# Altium PCB DRS_SCH-2017-05-16.PcbDoc
Units mil, origin at the board's own origin, x right, y up, seen from the top; angles counter-clockwise.
Board outline 5511.81 x 3149.61 mil, 2 copper layers (Top Layer, Bottom Layer); 76 components, 173 nets, 431 pads, 81 vias.
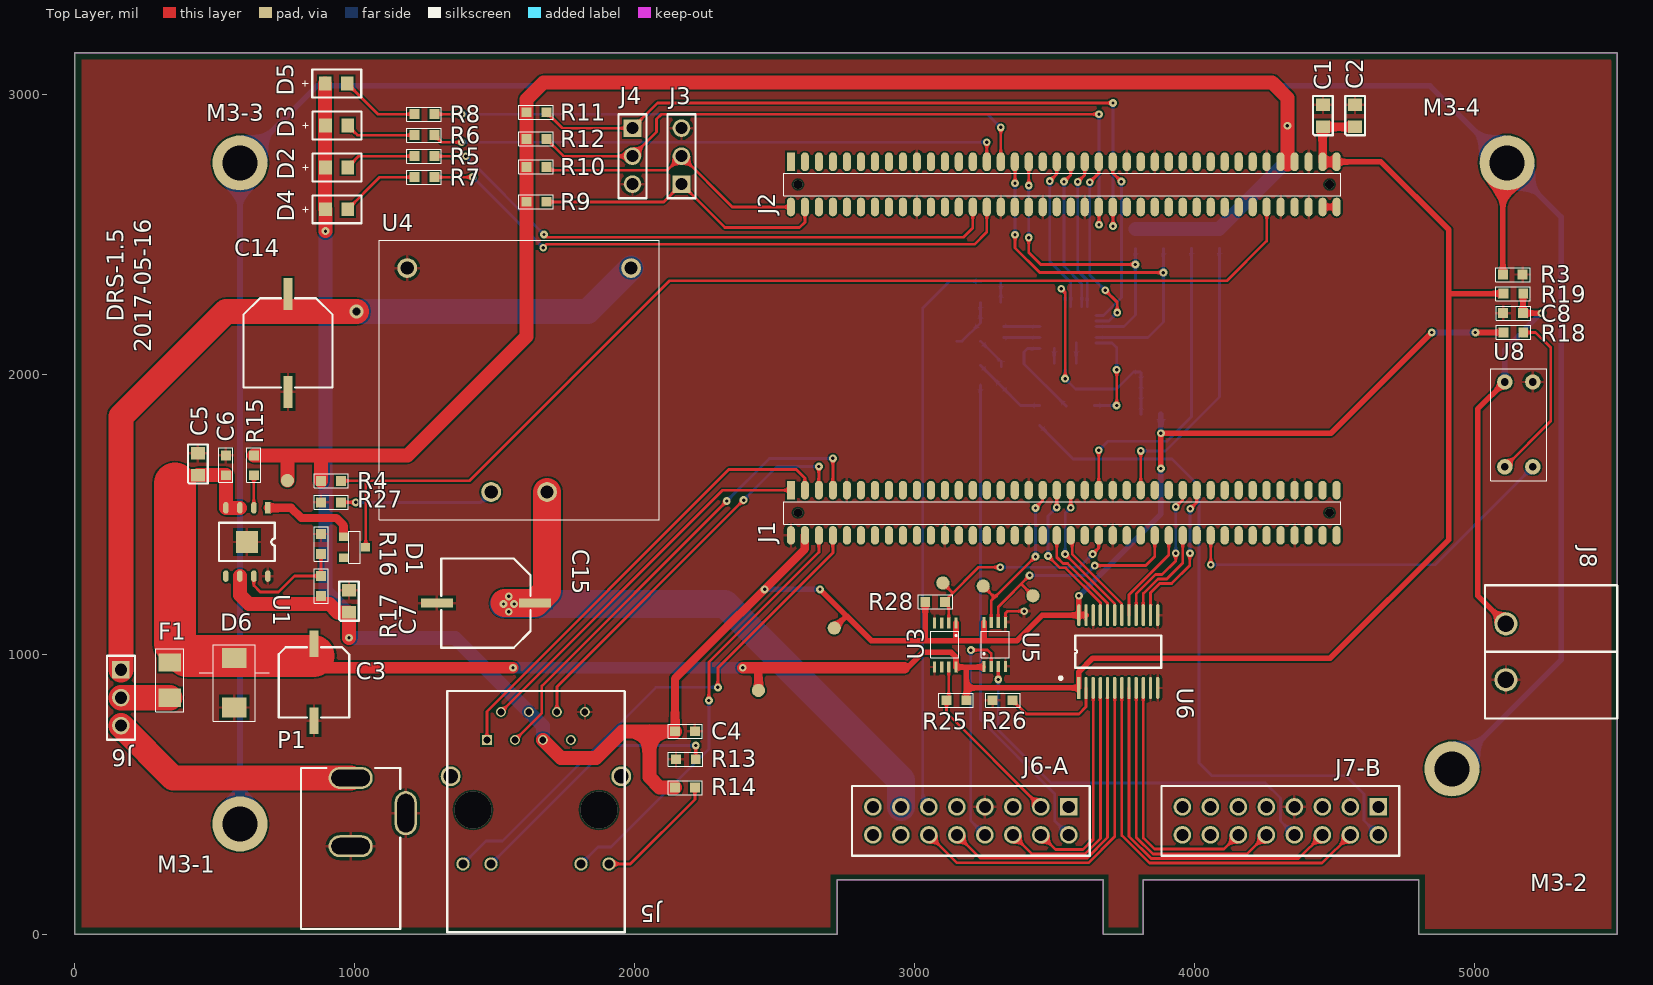
[diagram p0: Top Layer view]
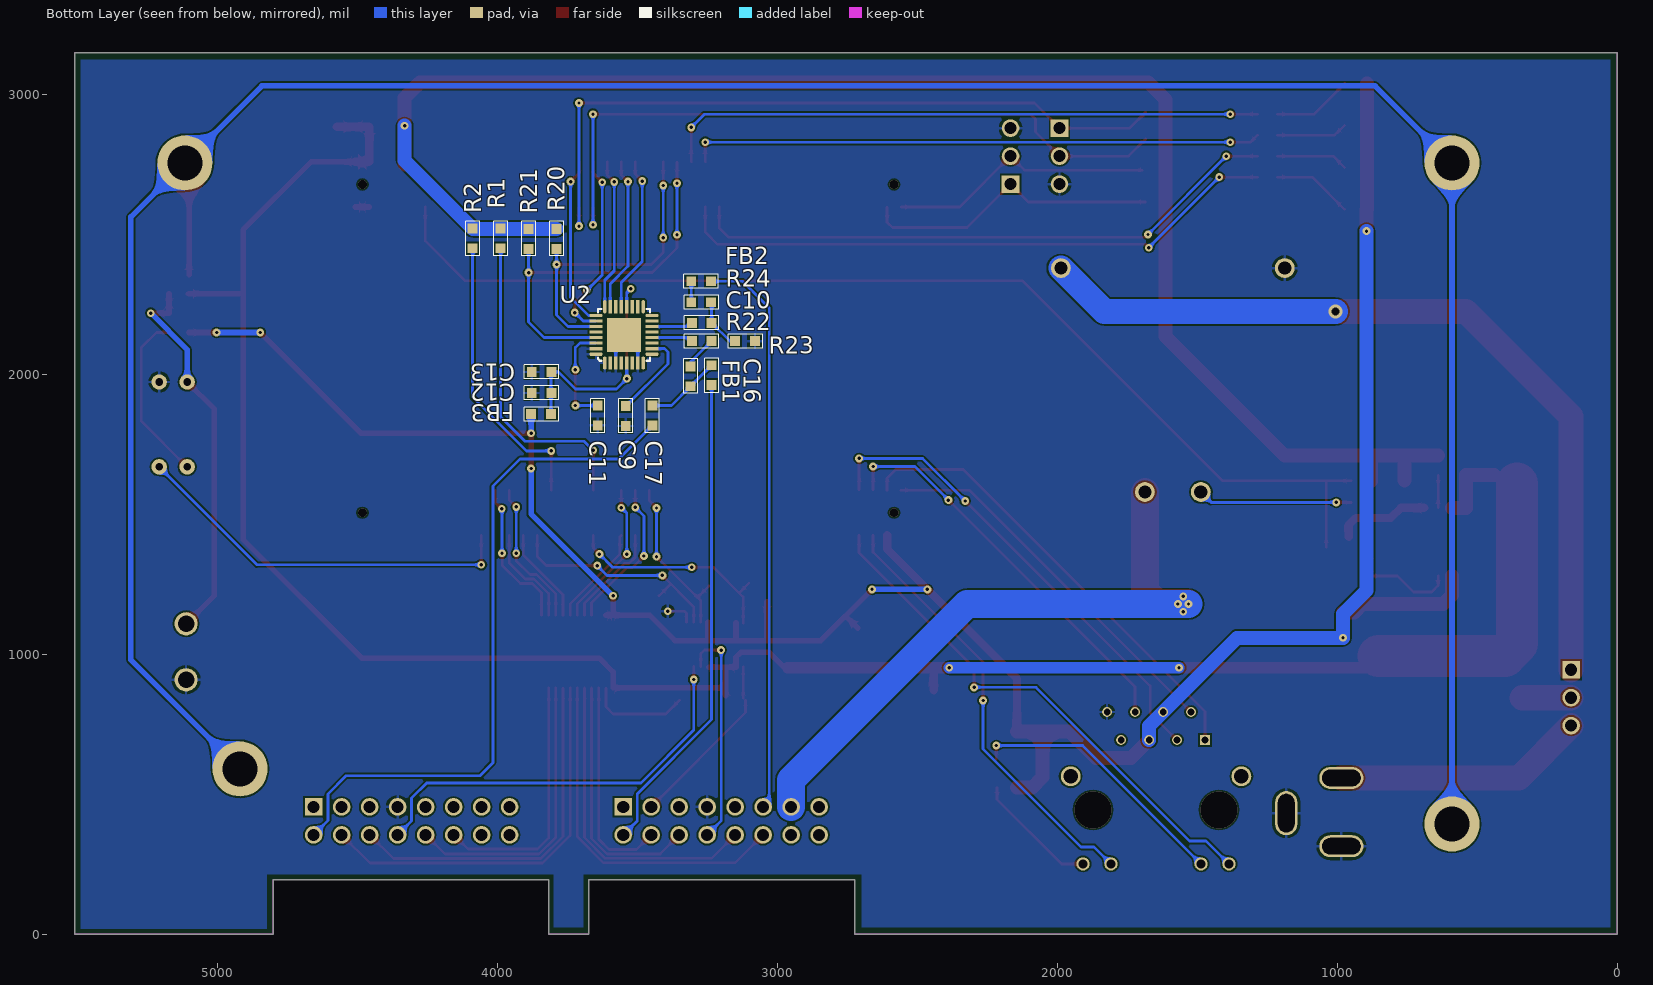
[diagram p1: Bottom Layer view, seen from below]

## Layer stack, top to bottom
Top Layer: signal copper 1.4
Dielectric: dielectric 12.6, FR-4, Dk 4.8
Bottom Layer: signal copper 1.4

## Board outline
0,0 0,3149.61 5511.81,3149.61 5511.81,0 4803.15,0 4803.15,194.33 3818.9,194.33 3818.9,0 3674.69,0 3674.69,194.33 2724.02,194.33 2724.02,0

## Design rules (kind name [scope] priority, off if disabled: settings)
Clearance [All] p1: gap=6
HoleSize [All] p1: absolutevalues=TRUE maxlimit=150 minlimit=1 maxpercent=80.000 minpercent=20.000
HoleToHoleClearance [All] p1: gap=8 allowstackedmicrovias=TRUE
MinimumSolderMaskSliver [All] p1: minsoldermaskwidth=0
PolygonConnect [All] p1: connectstyle=Relief reliefconductorwidth=10 reliefentries=4 polygonreliefangle="90 Angle"
RoutingVias [All] p1: holewidth=28 width=50 viastyle="Through Hole" minholewidth=12 minwidth=20 maxholewidth=208 maxwidth=250
SilkToSilkClearance [All] p1: silktosilkclearance=0
SilkscreenOverComponentPads SilkToSolderMaskClearance [IsPad] p1: minsilkscreentomaskgap=0
SolderMaskExpansion [All] p1: expansion=6
Width [All] p1: maxlimit=1000 minlimit=6 preferedwidth=10
23 further rules are at their usual default settings.

## Classes and differential pairs
component class "BTB CONNECTOR": C1 C2 J1 J2 R1 R2
component class DRS_SCH-02-24: C3 C4 C5 C6 C7 C8 C9 C10 C11 C12 C13 C14 C15 C16 C17 D1 D2 D3 D4 D5 D6 F1 FB1 FB2 FB3 J3 J4 J5 J6 J6-A J7-B J8 M3-1 M3-2 M3-3 M3-4 P1 R3 R4 R5 R6 R7 R8 R9 R10 R11 R12 R13 R14 R15 R16 R17 R18 R19 R20 R21 R22 R23 R24 R25 R26 R27 R28 U1 U2 U3 U4 U5 U6 U8

## Components (designator, comment, footprint, x,y, rotation, side; value= is the part's Value field where it differs from the comment)
C1 "10uF" C0805 4460,2885 r90 top
C2 "10uF" C0805 4575,2885 r90 top
C3 "47UF" RVT6.3 855,900 r90 top
C4 "0.01uF" 0603 2145,725 r0 top
C5 "10uF" C0805 440,1640 r90 top
C6 "1uF" 0603 540,1640 r90 top
C7 "10uF" C0805 980,1150 r90 top
C8 "22nF" 0603 5104,2219 r0 top
C9 "0.1uF" 0603 3543,1816.13 r90 bottom
C10 "1uF" 0603 3236,2184 r0 bottom
C11 "0.1uF" 0603 3643,1889 r270 bottom
C12 "0.1uF" 0603 3808,1934 r0 bottom
C13 "0.1uF" 0603 3808,2009 r0 bottom
C14 "470UF" RVT8 762,2113 r90 top
C15 "470UF" RVT8 1469,1183 r0 top
C16 "1uF" 0603 3236,2033 r270 bottom
C17 "1uF" 0603 3448,1889 r270 bottom
D1 "BAT54A-7-F" S9013 960,1420 r270 top
D2 "LED_BLUE" LED_BLUE 975,2740 r180 top
D3 "LED_BLUE" LED_BLUE 975,2890 r180 top
D4 "LED_BLUE" LED_BLUE 975,2590 r180 top
D5 "LED_BLUE" LED_BLUE 973.74,3040 r180 top
D6 "P4SMAJ5A" P4SMAJ5A 570,810 r90 top
F1 "FUSE 1A" "FUSE 1A" 340,845 r90 top
FB1 "BLM18HE102SN1D" 0603 3311,1958 r90 bottom
FB2 "BLM18HE102SN1D" 0603 3238,2333 r0 bottom
FB3 "BLM18HE102SN1D" 0603 3881,1858 r180 bottom
J1 "SMT-80-1-27P" DB40X2-1.27 2559.06,1425.2 r90 top
J2 "SMT-80-1-27P" DB40X2-1.27 2559.06,2598.43 r90 top
J3 "SIP4" SIP3 2168,2680 r90 top
J4 "SIP4" SIP3 1993,2880 r270 top
J5 "HR911105A" HR911105A 1822.99,794.02 r180 top
J6 "SIP4" SIP3 165,945 r270 top
J6-A "DB16-2.54" DB2X8-2.54 3551.97,455 r270 top
J7-B "DB16-2.54" DB2X8-2.54 4657.99,455 r270 top
J8 "EDG-2P" LZ1R-5.08-02P-140 5114,1109 r270 top
M3-1 "M3" M3#1 590.55,393.7 r0 top
M3-2 "M3" M3#2 4921.26,393.7 r0 top
M3-3 "M3" M3#1 590.55,2755.91 r0 top
M3-4 "M3" M3#3 4921.26,2755.91 r0 top
P1 "PJ200-A" KLD-0202 985.98,19.02 r90 top
R1 "4.7K" 0603 3990,2521.87 r270 bottom
R2 "4.7K" 0603 4090,2521.87 r270 bottom
R3 "0R" 0603 5103,2357 r0 top
R4 "10K" 0603 880,1620 r0 top
R5 "820R" 0603 1285,2780 r180 top
R6 "820R" 0603 1285,2855 r180 top
R7 "820R" 0603 1285,2705 r180 top
R8 "820R" 0603 1285,2930 r180 top
R9 "100K" 0603 1685,2617 r180 top
R10 "100K" 0603 1685,2742 r180 top
R11 "100K" 0603 1685,2937 r180 top
R12 "100K" 0603 1685,2842 r180 top
R13 "470R" 0603 2219,625 r180 top
R14 "470R" 0603 2145,524 r0 top
R15 "10K" 0603 640,1640 r90 top
R16 "15K" 0603 880,1430 r270 top
R17 "47K" 0603 880,1280 r270 top
R18 "220R" 0603 5105,2150 r0 top
R19 "220R" 0603 5176,2289 r180 top
R20 "1.5K" 0603 3790,2449 r90 bottom
R21 "1.5K" 0603 3890,2449 r90 bottom
R22 "2.7K" 0603 3236,2119 r0 bottom
R23 "4.7K" 0603 3152,2119 r180 bottom
R24 "10K" 0603 3308.87,2258 r180 bottom
R25 "10K" 0603 3186,836 r180 top
R26 "0R" 0603 3280,836 r0 top
R27 "0R" 0603 880,1543 r0 top
R28 "DNP" 0603 3039,1187 r0 top
U1 "RT9018AXXGSP" RT9018 690,1520 r270 top
U2 "SGTL5000 32QFN" "SGTL5000 32QFN" 3618,2055 r90 bottom
U3 "74LVC2T45" 74LVC2T45 3149,1112 r270 top
U4 "URB2405YMD-6WR2" URB2405YMD-6WR2 1488,1580 r0 top
U5 "74LVC2T45" 74LVC2T45 3249,957 r90 top
U6 "74LVC8T45 SOT355-1" 74LVC8T245 3588,880 r90 top
U8 "TPL521-1" TPL521-1 5110,1670 r90 top

## Footprints (in the part's own frame and the unit in brackets; to place one, negate y for a bottom-side part, rotate by r counter-clockwise, add the part's x,y. Pads: shape width x height; smd on the part's side, far side on the other; paste and mask are expansions set on the pad)
74LVC2T45 [mm]
  rect 1x0.3 smd: 1(0,0) 2(0,-0.65) 3(0,-1.3) 4(0,-1.95) 5(4,-1.95) 6(4,-1.3) 7(4,-0.65) 8(4,0)
  silkscreen extent 0.76,-2.29 3.18,0.25
74LVC8T245 [mm]
  rect 2x0.3 smd: 1(0,0)
  oval 2x0.3 smd: 2(0,-0.65) 3(0,-1.3) 4(0,-1.95) 5(0,-2.6) 6(0,-3.25) 7(0,-3.9) 8(0,-4.55) 9(0,-5.2) 10(0,-5.85) 11(0,-6.5) 12(0,-7.15) 13(6.6,-7.15) 14(6.6,-6.5) 15(6.6,-5.85) 16(6.6,-5.2) 17(6.6,-4.55) 18(6.6,-3.9) 19(6.6,-3.25) 20(6.6,-2.6) 21(6.6,-1.95) 22(6.6,-1.3) 23(6.6,-0.65) 24(6.6,0)
  silkscreen extent 0.76,-7.48 4.76,1.78
0603 [mm]
  rect 0.9x0.9 smd: 1(0,0) 2(1.8,0)
  silkscreen extent -0.64,-0.64 2.49,0.64
C0805 [mm]
  rect 1.15x1.25 smd: 1(0,0) 2(2,0)
  silkscreen extent -0.76,-0.89 2.79,0.89
DB2X8-2.54 [mm]
  rect 1.6x1.6 hole 1.1: 1(0,0)
  round 1.6 hole 1.1: 2(2.54,0) 3(0,-2.54) 4(2.54,-2.54) 5(0,-5.08) 6(2.54,-5.08) 7(0,-7.62) 8(2.54,-7.62) 9(0,-10.16) 10(2.54,-10.16) 11(0,-12.7) 12(2.54,-12.7) 13(0,-15.24) 14(2.54,-15.24) 15(0,-17.78) 16(2.54,-17.78)
  silkscreen extent -1.91,-19.69 4.45,1.9
DB40X2-1.27 [mm]
  rect 1.7x0.74 smd: 1(4.1,0)
  oval 1.7x0.74 smd: 2(0,0) 3(4.1,-1.27) 4(0,-1.27) 5(4.1,-2.54) 6(0,-2.54) 7(4.1,-3.81) 8(0,-3.81) 9(4.1,-5.08) 10(0,-5.08) 11(4.1,-6.35) 12(0,-6.35) 13(4.1,-7.62) 14(0,-7.62) 15(4.1,-8.89) 16(0,-8.89) 17(4.1,-10.16) 18(0,-10.16) 19(4.1,-11.43) 20(0,-11.43) 21(4.1,-12.7) 22(0,-12.7) 23(4.1,-13.97) 24(0,-13.97) 25(4.1,-15.24) 26(0,-15.24) 27(4.1,-16.51) 28(0,-16.51) 29(4.1,-17.78) 30(0,-17.78) 31(4.1,-19.05) 32(0,-19.05) 33(4.1,-20.32) 34(0,-20.32) 35(4.1,-21.59) 36(0,-21.59) 37(4.1,-22.86) 38(0,-22.86) 39(4.1,-24.13) 40(0,-24.13) 41(4.1,-25.4) 42(0,-25.4) 43(4.1,-26.67) 44(0,-26.67) 45(4.1,-27.94) 46(0,-27.94) 47(4.1,-29.21) 48(0,-29.21) 49(4.1,-30.48) 50(0,-30.48) 51(4.1,-31.75) 52(0,-31.75) 53(4.1,-33.02) 54(0,-33.02) 55(4.1,-34.29) 56(0,-34.29) 57(4.1,-35.56) 58(0,-35.56) 59(4.1,-36.83) 60(0,-36.83) 61(4.1,-38.1) 62(0,-38.1) 63(4.1,-39.37) 64(0,-39.37) 65(4.1,-40.64) 66(0,-40.64) 67(4.1,-41.91) 68(0,-41.91) 69(4.1,-43.18) 70(0,-43.18) 71(4.1,-44.45) 72(0,-44.45) 73(4.1,-45.72) 74(0,-45.72) 75(4.1,-46.99) 76(0,-46.99) 77(4.1,-48.26) 78(0,-48.26) 79(4.1,-49.53) 80(0,-49.53)
  silkscreen extent 1.02,-49.91 3.05,0.63
"FUSE 1A" [mm]
  rect 1.65x2.03 smd: 1(0,0) 2(3.2,0)
  silkscreen extent -1.27,-1.27 4.44,1.27
HR911105A [mm]
  rect 0.89x0.89 hole 0.6: 1(8.89,2.54)
  round 0.89 hole 0.6: 2(7.62,0) 3(6.35,2.54) 4(5.08,0) 5(3.81,2.54) 6(2.54,0) 7(1.27,2.54) 8(0,0)
  round 1.2 hole 0.8: 9(11.065,13.79) 10(8.525,13.79) 11(0.355,13.79) 12(-2.185,13.79)
  round 1.8 hole 1.3: 14(-3.305,5.84) 15(12.185,5.84)
  silkscreen extent -3.61,-1.91 12.49,20
KLD-0202 [mm] "DC Power Jack, 2.5mm, KLD Series, PCB Mount"
  oval 2x4 hole 1.5 slot 3.5 at 90 deg: 1A(13.7,0) 2A(7.5,0)
  oval 4x2 hole 1.5 slot 3.5 at 0 deg: 3A(10.5,-5)
  silkscreen extent 0,-4.5 14.6,4.5
LED_BLUE [mm]
  rect 1.15x1.25 smd: 1(0,0) 2(2,0)
  silkscreen extent -1.27,-1.27 4.06,1.27
LZ1R-5.08-02P-140 [mm]
  round 2.1 hole 1.5: 1(0,0) 2(5.08,0)
  silkscreen extent -3.5,-1.9 8.58,10.1
M3#1 [mm]
  round 5 hole 3.2: 1(0,0)
M3#2 [mm]
  round 5 hole 3.2: 1(0,5)
M3#3 [mm]
  round 5 hole 3.2: 1(5,0)
P4SMAJ5A [mm]
  rect 1.8x2.2 smd: 1(0,0) 2(4.5,0)
  silkscreen extent -1.27,-3.17 5.71,3.18
RT9018 [mm]
  rect 1.05x0.49 smd: 1(-0.09,0)
  oval 1.05x0.49 smd: 2(-0.09,-1.27) 3(-0.09,-2.54) 4(-0.09,-3.81) 5(6.11,-3.81) 6(6.11,-2.54) 7(6.11,-1.27) 8(6.11,0)
  rect 2x2 smd: 9(3.01,-1.905)
  silkscreen extent 1.27,-4.44 4.75,0.64
RVT6.3 [mm]
  rect 2.4x0.8 smd: 1(-3.5,0) 2(3.5,0)
  silkscreen extent -3.2,-3.2 3.17,3.2
RVT8 [mm]
  rect 2.9x0.8 smd: 1(-4.45,0) 2(4.45,0)
  silkscreen extent -4.05,-4.05 4.05,4.05
S9013 [mm]
  rect 0.8x0.8 smd: 1(0,0) 2(1.9,0) 3(0.95,2.02)
  silkscreen extent -0.51,0.51 2.41,1.52
"SGTL5000 32QFN" [mm]
  oct 1.2x0.3 smd: 1(-0.35,0) 8(-0.35,-3.5) 17(4.75,-3.5) 24(4.75,0)
  rect 1.2x0.3 smd: 2(-0.35,-0.5) 3(-0.35,-1) 4(-0.35,-1.5) 5(-0.35,-2) 6(-0.35,-2.5) 7(-0.35,-3) 18(4.75,-3) 19(4.75,-2.5) 20(4.75,-2) 21(4.75,-1.5) 22(4.75,-1) 23(4.75,-0.5)
  oct 0.3x1.2 smd: 9(0.45,-4.3) 16(3.95,-4.3) 25(3.95,0.8) 32(0.45,0.8)
  rect 0.3x1.2 smd: 10(0.95,-4.3) 11(1.45,-4.3) 12(1.95,-4.3) 13(2.45,-4.3) 14(2.95,-4.3) 15(3.45,-4.3) 26(3.45,0.8) 27(2.95,0.8) 28(2.45,0.8) 29(1.95,0.8) 30(1.45,0.8) 31(0.95,0.8)
  rect 3.1x3.1 smd: 33(2.2,-1.75)
  silkscreen extent -0.15,-4.1 4.55,0.6
SIP3 [mm]
  rect 1.6x1.6 hole 1.1: 1(0,0)
  round 1.6 hole 1.1: 2(2.54,0) 3(5.08,0)
  silkscreen extent -1.27,-1.27 6.35,1.27
TPL521-1 [mm]
  round 1.4 hole 0.7: 1(0,0) 2(0,-2.54) 3(7.7,-2.54) 4(7.7,0)
  silkscreen extent -1.27,-3.81 8.89,1.27
URB2405YMD-6WR2 [mm]
  round 1.8 hole 1.2: 1(0,0) 2(5.08,0) 3(12.7,20.32) 4(-7.62,20.32)
  silkscreen extent -10.16,-2.54 15.24,22.86

## Part data
C1 C2 C4 C5 C6 C7 C8 C9 C10 C11 C12 C13 C16 C17: library part CAP, "Capacitor"
C3 C14 C15: library part 7343
P1: library part PWR2.5, "Low Voltage Power Supply Connector"
R1 R2 R3 R4 R5 R6 R7 R8 R9 R10 R11 R12 R13 R14 R15 R16 R17 R18 R19 R20 R21 R22 R23 R24 R25 R26 R27 R28: library part RES2

## Free pads (board coordinates)
  round 47.24 smd: 0(3246,1244) 1(3424,1209) 2(3102,1255) 3(2443,871) 4(760,1621) 5(2714,1094)

## Via types
v1: diameter 28, hole 12, Top Layer to Bottom Layer, 74 vias
v2: diameter 31.5, hole 31.5, Top Layer to Bottom Layer, 4 vias
v3: diameter 131.89, hole 131.89, Top Layer to Bottom Layer, 2 vias
v4: diameter 50, hole 28, Top Layer to Bottom Layer, 1 vias

## Nets (pads, with @x,y where several pads share a name; then routed paths per layer and width w, separated by ;. In a path a pad name is that pad's centre, name@x,y a point inside that pad or via, vN(x,y) a via of type N, cw(c..) or ccw(c..) an arc to the next point about the centre after c; other vN are vias at no path point)
A_CD: J1.46 pad.2 R28.2 U3.2 | length 796
  Top Layer w10: pad.2 3137,1220 ; U3.2 3123.41,1205.41 3229,1311 v1(3307,1311) ; v1(3637,1358) 3659.06,1380.06 J1.46
  Bottom Layer w10: v1(3307,1311) 3590,1311 v1(3637,1358)
A_IO1: J1.39 U6.21 | length 548.4
  Top Layer w10: v1(3478,1351.37) 3520.37,1309 3540,1309 3664.77,1184.23 U6.21 ; v1(3509,1525) J1.39@3509,1586.56
  Bottom Layer w10: v1(3478,1351.37) 3478,1494 v1(3509,1525)
A_IO2: J1.40 U6.20 | length 370.4
  Top Layer w10: J1.40 3509.06,1346.94 3531,1325 3548,1325 3690.36,1182.64 U6.20
A_IO3: J1.41 U6.19 | length 528.3
  Top Layer w10: v1(3539,1358) 3715.95,1181.05 U6.19 ; v1(3559,1524) J1.41@3559,1586.56
  Bottom Layer w10: v1(3539,1358) 3539,1504 v1(3559,1524)
A_IO4: J1.42 U6.18 | length 360.9
  Top Layer w10: J1.42 3564,1420.25 3564,1358 3741.54,1180.46 U6.18
A_PPT: J1.37 pad.0 U5.7 | length 606.5
  Top Layer w10: pad.0 3287,1203 ; U5.7 3274.59,1190.59 3287,1203 ; v1(3433,1349) 3287,1203 ; v1(3433,1523) 3459.06,1549.06 J1.37
  Bottom Layer w10: v1(3433,1349) v1(3433,1523)
AUART0_CTS: J2.1
AUART0_RTS: J2.3
AUART0_RX: J2.2 J3.2 R10.1 | length 958
  Top Layer w10: R10.1@1697,2730 2118,2730 J3.2 2349.57,2598.43 J2.2
AUART0_TX: J2.4 J3.1 R9.1 | length 1076.3
  Top Layer w10: R9.1@1685.5,2616.5 2104.5,2616.5 J3.1 2323,2525 2590,2525 2609.06,2544.06 J2.4
AUART1_CTS: J1.11
AUART1_RTS: J1.13
AUART1_RX: J1.12
AUART1_TX: J1.14
AUART2_CTS: J1.15
AUART2_RTS: J1.17
AUART2_RX: J1.16
AUART2_TX: J1.18
AUART3_CTS: J1.19
AUART3_RTS: J1.21
AUART3_RX: J1.20
AUART3_TX: J1.22
B_CD: J1.55
B_IO1: J1.56 U6.17 | length 344.1
  Top Layer w10: U6.17 3767.13,1212.76 3909.06,1354.68 J1.56
B_IO2: J1.57 U6.16 | length 529.1
  Top Layer w10: U6.16 3792.72,1215.72 3862,1285 3885,1285 3934,1334 3934,1360.94 v1(3934.06,1361) ; v1(3934.06,1526.94) 3959.06,1551.94 J1.57
  Bottom Layer w10: v1(3934.06,1361) v1(3934.06,1526.94)
B_IO3: J1.58 U6.15 | length 362.2
  Top Layer w10: U6.15 3818.32,1216.94 3870.37,1269 3902,1269 3959.06,1326.06 J1.58
B_IO4: J1.59 U6.14 | length 540.1
  Top Layer w10: U6.14 3843.91,1219.91 3877,1253 3919.63,1253 3984,1317.37 3984,1360 v1(3985,1361) ; v1(3986,1520) 4009.06,1543.06 J1.59
  Bottom Layer w10: v1(3985,1361) 3985,1519 v1(3986,1520)
B_PPT: J1.54 pad.1 U5.6 | length 824.2
  Top Layer w10: U5.6 3300.18,1170.18 v1(3412,1282) ; 3382,1251 pad.1 ; v1(3645,1317) 3827,1317 3859.06,1349.06 J1.54
  Bottom Layer w10: v1(3412,1282) 3610,1282 v1(3645,1317)
DGND: C1.2 C2.2 C3.1 C4.2 C5.2 C6.2 C7.2 C8.1 C9.1 C11.2 C12.2 C13.2 C14.1 C15.1 D6.1 J1.2 J1.9 J1.24 J1.35 J1.36 J1.43 J1.47 J1.48 J1.73 J1.74 J2.19 J2.20 J2.32 J2.38 J2.44 J2.49 J2.53 J2.69 J2.72 J2.75 J2.76 J3.3 J4.3 J5.8 J6-A.7 J7-B.7 J8.2 P1.2A P1.3A R3.2 R13.2 R16.1 R23.2 R26.1 R27.1 U1.8 U1.9 U2.1 U2.3 U2.7 U2.31 U2.32 U2.33 U3.4 U3.5 U4.4 U5.4 U5.5 U6.11 U6.12 U6.13 U6.22 U8.3 | length 224.6
  Top Layer w10: U5.5 3325.77,1146.77 3333,1154 v1(3393,1154)
  Bottom Layer w10: U2.7 U2.33@3499.89,2092.4 ; U2.3 U2.33@3578.63,2112.09
ENET0_COL: J1.34
ENET0_CRS: J1.33
ENET0_RXD2: J1.29
ENET0_RXD3: J1.31
ENET0_TXD2: J1.30
ENET0_TXD3: J1.32
ENET1_INT: J1.23
ENET_CLK: J1.26
ENET_FEC_RESET_B: J1.25
ENET_MDC: J1.27
ENET_MDIO: J1.28
ETH0_RX+: J1.7 J5.3 | length 1722.8
  Top Layer w10: J5.3 1669,790.02 1669,887 v1(2330,1548) ; J1.7@2709,1586.67 v1(2709,1700)
  Bottom Layer w10: v1(2330,1548) 2482,1700 v1(2709,1700)
ETH0_RX-: J1.5 J5.6 | length 1436.3
  Top Layer w10: J5.6 1722.99,883.99 v1(2390,1551) ; J1.5@2659,1586.67 v1(2659,1671)
  Bottom Layer w10: v1(2390,1551) 2510,1671 v1(2659,1671)
ETH0_TX+: J1.3 J5.1 | length 1651.1
  Top Layer w10: J5.1 1472.99,795.99 2337,1660 2578,1660 2609.06,1628.94 J1.3
ETH0_TX-: J1.1 J5.2 | length 1364.4
  Top Layer w10: J5.2 2315.59,1586.61 J1.1
GND_EARTH: M3-1.1 M3-2.1 M3-3.1 M3-4.1 R3.1 | length 9929.5
  Top Layer w20: R3.1 5103,2740.8 M3-4.1
  Bottom Layer w20: M3-1.1 M3-3.1 865.65,3031 4843.02,3031 M3-4.1 5311,2563.02 5311,980.29 M3-2.1
GPMI_CE1N: J1.79
GPMI_CE2N: J1.77
GPMI_CE3N: J1.75
GPMI_READY1: J1.80
GPMI_READY2: J1.78
GPMI_READY3: J1.76
HSADC0: J2.51
I2C0_SCL: J2.33 R21.1 U2.29 | length 1398.7
  Top Layer w10: v1(3360,2499) 3360,2452 3448,2364 v1(3890,2364) ; v1(3360,2683) J2.33@3360,2758.9
  Bottom Layer w10: v1(3360,2499) v1(3360,2683) ; U2.29 3834.77,2131.77 3890,2187 R21.1
I2C0_SDA: J2.35 R20.1 U2.27 | length 1117
  Top Layer w10: v1(3409,2489) 3409,2436 3452,2393 v1(3790,2393) ; v1(3409,2675) J2.35@3409,2759.79
  Bottom Layer w10: v1(3409,2489) v1(3409,2675) ; U2.27 3749.14,2171.14 3790,2212 R20.1
JTAG_RTCK: J2.66
JTAG_TCK: J2.58
JTAG_TDI: J2.60
JTAG_TDO: J2.62
JTAG_TMS: J2.56
JTAG_TRST: J2.64
LCD_D00: J1.49
LCD_D01: J1.50
LCD_D02: J1.51 R2.2 | length 1032.3
  Top Layer w10: J1.51@3809,1586.67 v1(3809,1727)
  Bottom Layer w10: v1(3809,1727) 3897,1727 4090,1920 R2.2
LCD_D03: J1.52
LCD_D04: J1.53
LCD_D19: J1.68
LCD_D20: J1.69
LCD_D21: J1.70
LCD_D22: J1.71
LCD_D23: J1.72
LCD_RS: J1.45 R1.2 | length 1125.1
  Top Layer w10: v1(3659,1729) 3659,1586.67 J1.45
  Bottom Layer w10: v1(3659,1729) 3691,1761 3902,1761 3990,1849 R1.2
LED1: J1.8 J5.9 | length 1885.4
  Top Layer w10: v1(2298,882) 2298,952 2709.06,1363.06 J1.8
  Bottom Layer w10: J5.9 1469.26,333 1528,333 2077,882 v1(2298,882)
LED2: J1.6 J5.11 | length 1553.2
  Top Layer w10: v1(2266,835) 2266,972 2659.06,1365.06 J1.6
  Bottom Layer w10: J5.11 1869.91,312 1916,312 2266,662 v1(2266,835)
LI-ION_BATTERY: J2.78 J2.80 | length 50
  Top Layer w20: J2.78 J2.80
LINEIN_AUD_SEL0: J1.60
LINEIN_AUD_SEL1: J1.61
LINEOUT_AUD_SEL0: J1.63
LINEOUT_AUD_SEL1: J1.64
LRADC0: J2.55
LRADC1: J2.57
LRADC2: J2.59
LRADC3: J2.61
LRADC4: J2.63
LRADC5: J2.65
LRADC6: J2.67
NetC8_2: C8.2 J8.1 R19.1 U8.4 | length 1379.9
  Top Layer w20: U8.4 5013,1876.15 5013,1210 J8.1 ; R19.1@5174.87,2287.87 C8.2 v1(5240,2219)
  Bottom Layer w20: U8.4 5110,2089 v1(5240,2219)
NetC9_2: C9.2 U2.10 | length 317.4
  Bottom Layer w10: U2.10 3404.4,2092.4 3392,2080 3392,2037.99 C9.2
NetC10_1: C10.1 R23.1 R24.2 | length 182.9
  Bottom Layer w10: R23.1 3171,2119 C10.1 R24.2@3236,2255.99
NetC10_2: C10.2 U2.14 | length 129
  Bottom Layer w10: C10.2@3319.72,2171.14 U2.14
NetC11_1: C11.1 U2.30 | length 367.2
  Top Layer w10: v1(3723,1889) v1(3723,2017)
  Bottom Layer w10: C11.1 v1(3723,1889) ; U2.30 3706.91,2112.09 3723,2096 v1(3723,2017)
NetC12_1: C12.1 C13.1 FB3.2 U2.5 U2.20 | length 911.3
  Top Layer w10: v1(3525,2306) 3539.26,2291.74 3539,2291.48 v1(3539,1985)
  Bottom Layer w10: v1(3525,2306) 3539.26,2291.74 U2.20 ; v1(3539,1985) 3576,1948 3722,1948 3783,2009 C13.1 ; v1@3539.26,1985.26 U2.5 ; FB3.2 C13.1@3810.13,2006.87
NetC15_2: C15.2 J6-A.13 U4.2 | length 2300.9
  Top Layer w100: v1@1535,1183 C15.2 1688,1226.8 U4.2
  Bottom Layer w100: v1(1532,1180) v1(1570,1180) 2323,1180 2951.97,551.03 J6-A.13
  other v1: 1551,1152 1551,1207
NetC16_1: C16.1 C17.1 FB1.1 | length 271.6
  Bottom Layer w10: C16.1 FB1.1 3380,1889 C17.1
NetC16_2: C16.2 J6-A.2 | length 1738
  Bottom Layer w10: C16.2 3236,767 3502,501 3502,404.97 J6-A.2
NetC17_2: C17.2 J7-B.2 | length 2451
  Bottom Layer w10: C17.2 3568.13,1698 3921,1698 4017.5,1601.5 4017.5,612.5 4064,566 4542,566 4607,501 4607,405.99 J7-B.2
NetD2_1: D2.1 R5.2 | length 255.7
  Top Layer w10: D2.1 1015,2780 R5.2
NetD3_1: D3.1 R6.2 | length 253.6
  Top Layer w10: D3.1 1010,2855 R6.2
NetD4_1: D4.1 R7.2 | length 286.8
  Top Layer w10: D4.1 1090,2705 R7.2
NetD5_1: D5.1 R8.2 | length 286
  Top Layer w10: D5.1 1083.74,2930 R8.2
NetF1_1: F1.1 J6.2 | length 175
  Top Layer w90: J6.2 F1.1
NetFB1_2: FB1.2 R22.1 | length 121.2
  Bottom Layer w10: R22.1 3311,2044 FB1.2
NetFB2_1: FB2.1 J6-A.11 | length 2038.9
  Bottom Layer w10: J6-A.11 3030,476.97 3030,2237 3126,2333 FB2.1
NetFB2_2: FB2.2 R24.1 | length 75
  Bottom Layer w10: R24.1 FB2.2
NetJ5_10: J5.10 R13.1 | length 955.8
  Top Layer w10: R13.1 v1(2219,674)
  Bottom Layer w10: J5.10 1910.26,674 v1(2219,674)
NetJ5_12: J5.12 R14.2 | length 444.6
  Top Layer w10: J5.12 1985.1,251.1 2215.87,481.87 R14.2
NetJ6-A_3: J6-A.3 R25.2 U3.7 | length 630.8
  Top Layer w10: R25.2 3115.13,791.83 J6-A.3 ; R25.2@3123.41,844.28 U3.7
NetJ6-A_4: J6-A.4 U6.3 | length 764.6
  Top Layer w10: J6-A.4 3503.97,303 3603,303 3639.18,339.18 U6.3
NetJ6-A_6: J6-A.6 U6.4 | length 901.7
  Top Layer w10: J6-A.6 3419.97,287 3609.63,287 3664.77,342.14 U6.4
NetJ6-A_8: J6-A.8 U5.2 | length 803.9
  Top Layer w10: v1(3202,1015) 3262,1015 3274.59,1002.41 U5.2
  Bottom Layer w10: v1(3202,1015) 3202,404.97 J6-A.8
NetJ6-A_10: J6-A.10 U6.5 | length 1138.8
  Top Layer w10: J6-A.10 3235.97,271 3616.25,271 3690.36,345.11 U6.5
NetJ6-A_12: J6-A.12 U6.6 | length 1275.9
  Top Layer w10: J6-A.12 3151.97,255 3622.88,255 3715.95,348.07 U6.6
NetJ6_3: J6.3 P1.1A | length 898.3
  Top Layer w90: J6.3 351.61,558.39 P1.1A
NetJ7-B_4: J7-B.4 U6.7 | length 1426.6
  Top Layer w10: U6.7 3741.54,352.46 3840,254 4456.99,254 J7-B.4
NetJ7-B_6: J7-B.6 U6.8 | length 1289.5
  Top Layer w10: U6.8 3767.13,349.49 3846.63,270 4372.99,270 J7-B.6
NetJ7-B_8: J7-B.8 U5.3 | length 1488.2
  Top Layer w10: v1(3300,910) U5.3@3300,956.82
  Bottom Layer w10: v1(3300,910) 3300,729 3489,540 4254,540 4308,486 4308,404.99 J7-B.8
NetJ7-B_10: J7-B.10 U6.9 | length 1052.4
  Top Layer w10: U6.9 3792.72,346.53 3853.25,286 4188.99,286 J7-B.10
NetJ7-B_12: J7-B.12 U6.10 | length 913.6
  Top Layer w10: U6.10 3818.32,343.57 3857.88,304 4106.99,304 J7-B.12
NetR15_1: R15.1 U1.2 | length 116.5
  Top Layer w10: U1.2 R15.1
NetR16_2: R16.2 R17.1 U1.7 | length 385.7
  Top Layer w10: U1.7 640,1246 663,1223 728,1223 785,1280 R17.1 R16.2
NetR18_2: R18.2 U8.1 | length 614.4
  Top Layer w10: U8.1 5274,1834 5274,2096 5220,2150 R18.2
NetR22_2: R22.2 U2.12 | length 129.1
  Bottom Layer w10: R22.2@3319.64,2131.77 U2.12
NetR26_2: R26.2 U6.2 | length 361
  Top Layer w10: R26.2 3399.87,787 3588,787 3613.59,812.59 U6.2
NetR27_2: R27.2 U4.1 | length 552.5
  Top Layer w10: R27.2 v1(1004,1543)
  Bottom Layer w10: v1(1004,1543) 1451,1543 U4.1
PSWITCH: J2.68
PWM0: J2.46 J4.2 R12.1 | length 2547.8
  Top Layer w10: R12.1 1747,2780 J4.2 2079,2866 2079,2913 2096,2930 v1(3660,2930) ; v1(3660,2535) J2.46@3660,2597.48
  Bottom Layer w10: v1(3660,2535) v1(3660,2930)
PWM1: J2.48 J4.1 R11.1 | length 2593.4
  Top Layer w10: R11.1 1742,2880 J4.1 2083,2970 v1(3710,2970) ; v1(3710,2530) J2.48@3710,2597.48
  Bottom Layer w10: v1(3710,2530) v1(3710,2970)
PWM2: J2.50
PWM3: J2.52
PWM4: J2.54
RELAY: J1.62 U8.2 | length 1401.1
  Top Layer w10: v1(4059,1320) J1.62@4059,1425.14
  Bottom Layer w10: v1(4059,1320) 4860,1320 U8.2
RESETN: D1.3 J2.70 R4.2 | length 4018.4
  Top Layer w10: R4.2 1410,1620 2125,2335 4117,2335 4259.06,2477.06 J2.70 ; D1.3 1039.53,1616.47
SAIF0_BITCLK: J2.43 U2.24 | length 542.3
  Top Layer w10: v1(3584,2688) 3609.06,2713.06 J2.43
  Bottom Layer w10: v1(3584,2688) 3584,2370.63 3618,2336.63 U2.24
SAIF0_LRCLK: J2.41 U2.23 | length 554
  Top Layer w10: v1(3535,2689) 3559.06,2713.06 J2.41
  Bottom Layer w10: v1(3535,2689) 3535,2387 3598.32,2323.68 U2.23
SAIF0_MCLK: J2.39 U2.21 | length 559.3
  Top Layer w10: v1(3484,2691) 3509.06,2716.06 J2.39
  Bottom Layer w10: v1(3484,2691) 3484,2403 3558.95,2328.05 U2.21
SAIF0_SDATA0: J2.45 U2.26 | length 680.7
  Top Layer w10: v1(3627,2687) 3659.06,2719.06 J2.45 ; v1(3682,2301) 3725,2258 v1(3725,2221)
  Bottom Layer w10: v1(3627,2687) 3627,2356 v1(3682,2301) ; U2.26 3694.83,2190.83 v1(3725,2221)
SAIF1_SDATA0: J2.47 U2.25 | length 614.9
  Top Layer w10: J2.47 3709.06,2719.94 v1(3740,2689)
  Bottom Layer w10: U2.25 3675.51,2210.51 3740,2275 v1(3740,2689)
SPDIF: J2.37
SSP0_CMD: J2.21
SSP0_DATA0: J2.24
SSP0_DATA1: J2.25
SSP0_DATA2: J2.26
SSP0_DATA3: J2.27
SSP0_DATA4: J2.28 R5.1 | length 2132.7
  Top Layer w10: R5.1 v1(1397,2780) ; v1(1677,2500) 1687,2490 3175,2490 3209.06,2524.06 J2.28
  Bottom Layer w10: v1(1397,2780) v1(1677,2500)
SSP0_DATA5: J2.29 R6.1 | length 2054.5
  Top Layer w10: R6.1 1310,2830 v1(1383,2830) ; v1(3259,2830) 3259,2759.9 J2.29
  Bottom Layer w10: v1(1383,2830) v1(3259,2830)
SSP0_DATA6: J2.30 R7.1 | length 2191
  Top Layer w10: R7.1 v1(1422,2705) ; v1(1674,2453) 1686,2465 3215,2465 3259.06,2509.06 J2.30
  Bottom Layer w10: v1(1422,2705) v1(1674,2453)
SSP0_DATA7: J2.31 R8.1 | length 2166.6
  Top Layer w10: R8.1 v1(1383,2930) ; v1(3309,2883) 3309,2759.9 J2.31
  Bottom Layer w10: v1(1383,2930) 3262,2930 v1(3309,2883)
SSP0_DETECT: J2.23
SSP0_SCK: J2.22
SSP1_CMD: J2.8
SSP1_DATA0: J2.5
SSP1_DATA3: J2.7
SSP1_SCK: J2.6
SSP2_MISO: J2.15
SSP2_MOSI: J2.13
SSP2_SCK: J2.14
SSP2_SS0: J2.16
SSP2_SS1: J2.18
SSP2_SS2: J2.17
SSP3_MISO: J2.11
SSP3_MOSI: J2.9
SSP3_SCK: J2.10
SSP3_SS0: J2.12
SWB_5V: C14.2 J6.1 U4.3 | length 2947.5
  Top Layer w90: J6.1 165,1850 540,2225 v4(1007,2225)
  Bottom Layer w90: v4(1007,2225) 1833,2225 U4.3
USB0DM: J2.40
USB0DP: J2.42
USB1DM: J2.34
USB1DP: J2.36
VDD4P2: J2.74
VDD_3V3: C4.1 C7.1 D2.2 D3.2 D4.2 D5.2 FB3.1 J1.4 J5.4 J5.5 pad.5 R14.1 R17.2 R18.1 R28.1 U1.6 U3.1 U5.8 U6.23 U6.24 | length 8963.3
  Top Layer w20: v1(2663,1232) 2846,1049 3367,1049 3457.84,1139.84 U6.24 ; pad.5 2757,1137 ; 3039,1050 R28.1 ; 3149,1050 U3.1 ; 3249,1050 U5.8 ; v1(3588,1209) U6.24 ; U6.23 U6.24 ; v1(3881,1664) v1(3881,1790) 4489,1790 v1(4849,2150) ; v1(5005,2150) R18.1
  Top Layer w30: C4.1 2145,913 2609.06,1377.06 J1.4
  Top Layer w50: U1.6 590,1212.13 623.13,1179 910.13,1179 939.13,1150 C7.1 v1(980,1059) ; D4.2@895,2591.26 D5.2 ; v1(896.26,2512.26) D4.2 ; J5.5 1738.01,629 1862,629 1958,725 2053,725 ; R14.1 2090,524 2053,561 2053,725 ; C4.1 2053,725
  Bottom Layer w20: v1(2465,1232) v1(2663,1232) ; v1(3588,1209) 3881,1502 v1(3881,1664) ; v1(3881,1790) FB3.1 ; v1(4849,2150) v1(5005,2150)
  Bottom Layer w50: v1(896.26,2512.26) 896.26,1227.74 980,1144 v1(980,1059) 1358.01,1059 J5.4 1672.99,744.02 J5.5
VDD_3V3_PG: D1.1 U1.1 | length 337.5
  Top Layer w30: U1.1 773.46,1523.54 810,1487 935,1487 960,1462 D1.1
VDD_5V: C1.1 C2.1 C3.2 C5.1 C6.1 D6.2 F1.2 J2.77 J2.79 pad.3 R19.2 R25.1 U1.3 U1.4 U3.8 U5.1 U6.1 | length 8061.2
  Top Layer w20: 2975,952 3030,1007 3132,1007 3149,990 U3.8 U5.1@3246.52,954.52 ; R25.1@3186,852 3186,880 ; 3186,953.52 3186,880 ; J2.79 4667.16,2759.84 4910,2517 4910,1410 4486,986 3637,986 3588,937 U6.1 3186,880 ; 4912,2289 R19.2
  Top Layer w30: pad.3 2443,949 ; J2.79 J2.77 4459.06,2884.06 C1.1 C2.1
  Top Layer w40: 842,952 v1(1566,952) ; v1(2387,952) 2965,952
  Top Layer w50: C5.1 C6.1 U1.4 U1.3
  Top Layer w150: 358,1610 358,1038 402,994 C3.2@854,994
  Bottom Layer w40: v1(1566,952) v1(2387,952)
VDDIO_3V3: J2.71 J2.73 pad.4 R1.1 R2.1 R4.1 R9.2 R10.2 R11.2 R12.2 R15.2 R20.2 R21.2 | length 5941.5
  Top Layer w50: R15.2 1188.87,1710.87 1614.13,2136.13 R9.2 R10.2 R12.2 R11.2 1614.13,2982.13 1675,3043 4279,3043 4334,2988 4334,2751 ; pad.4 760,1706.87 ; R4.1 880,1705.87
  Bottom Layer w50: R20.2 R21.2 4087.99,2519.87 R2.1 4333,2764.87 v1(4333,2889)
VDDXTAL: J1.10
pads on no net: D1.2 J1.38 J1.44 J1.65 J1.66 J1.67 J5.7 J5.14 J5.15 J6-A.1 J6-A.5 J6-A.9 J6-A.14 J6-A.15 J6-A.16 J7-B.1 J7-B.3 J7-B.5 J7-B.9 J7-B.11 J7-B.13 J7-B.14 J7-B.15 J7-B.16 U1.5 U2.2 U2.4 U2.6 U2.8 U2.9 U2.11 U2.13 U2.15 U2.16 U2.17 U2.18 U2.19 U2.22 U2.28 U3.3 U3.6
copper on no net:
  other v2: 2584.06,1505.91 4484.06,1505.91 2584.06,2679.13 4484.06,2679.13
  other v3: 1423.19,444.02 1873.19,444.02

## Polygon pours and split planes (outlines as drawn)
DGND on Top Layer "Top Layer" (solid, pour order 2): 25,25 2700,25 2700,215 3695,215 3695,25 3800,25 3800,215 4825,215 4825,20 5490,20 5490,3120 5495,3125 25,3125
DGND on Bottom Layer "Bottom Layer" (solid, pour order 4): 25,25 2700,25 2700,215 3695,215 3695,25 3800,25 3800,215 4825,215 4825,20 5490,20 5490,3125 25,3125

## Keep-outs
Keep-Out Layer:
  the board outline again, w3.94

## Silkscreen, mask and mechanical layers (free items; w line width, h text height)
Top Overlay:
  text "DRS-1.5" at 176,2189 h60 r90
  text "2017-05-16" at 274,2080 h60 r90

## Text inside footprints (layer, text, board x,y; h text height)
P1: Mechanical 1 "Alert PCB fab to slot details" at 747.17,30.28 h11.81 r90; Mechanical 1 "Assign keep-out area to slot" at 727.48,30.28 h11.81 r90; Mechanical 1 "Mech 1 - Slot cut-out" at 766.85,30.28 h11.81 r90; Mechanical 1 "Mech 2 - Clearance, move to internal plane if present" at 786.54,30.28 h11.81 r90